# EAGLE board klbr4breakout (EAGLE 6.5.0)
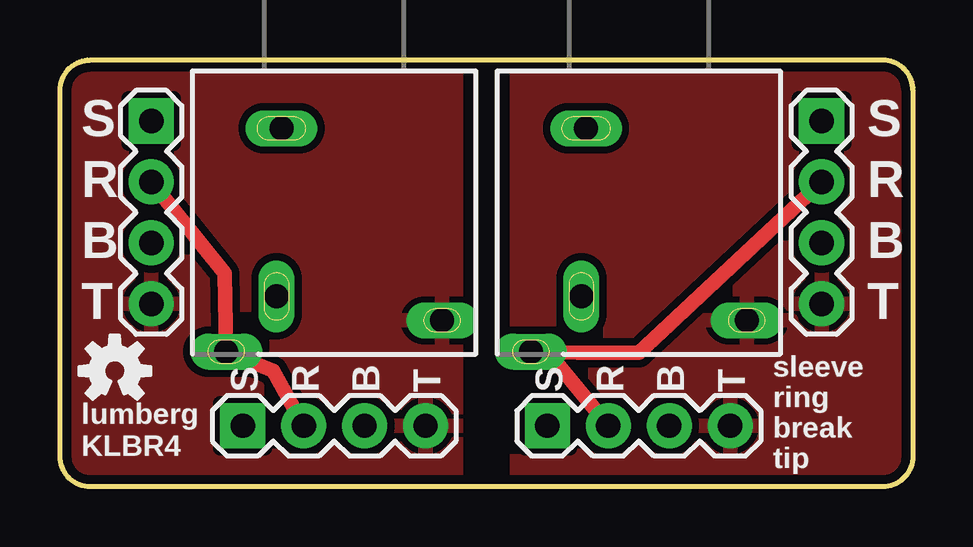
[diagram p0: board, top side]
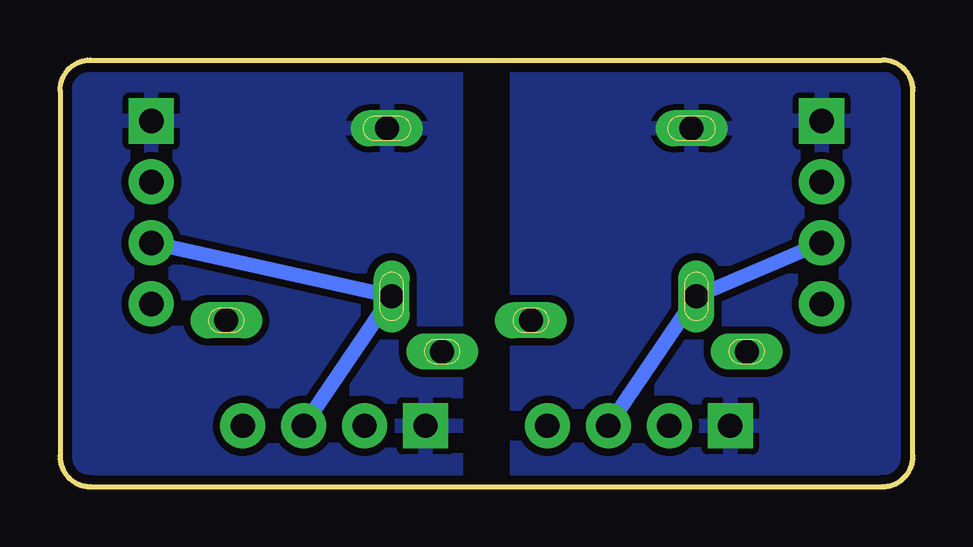
[diagram p1: board, bottom side, seen from below]

Size 35.56 x 17.78 mm. Coordinates in mm from the lower left corner, seen from the top.
Outline: 34.29,17.78 1.27,17.78 arc90 0,16.51 0,1.27 arc90 1.27,0 34.29,0 arc90 35.56,1.27 35.56,16.51 arc90 34.29,17.78
Copper layers (1*16): Top 0.0356mm / dielectric 1.5011mm / Bottom 0.0356mm
Design rules "LaenPCBOrder_Conservative": minimum track width 13mil, minimum drill 13mil, track to track 12mil, track to pad 12mil, pad to pad 12mil, via to via 12mil, smd to smd 12mil, copper to edge 15mil, drill to drill 12mil, minimum pad ring 7mil, minimum via ring 7mil, stop-mask expansion 4mil, vias tented up to drill 0mil, thermal gap 10mil
Net classes: 0 default: width 0.61 mm

## Footprints (pad centres in the part's own frame; a part is rotated, then mirrored left to right if it is on the bottom)
1X04 = drill 1.016 pad 1.88 square: 1 0,0 | drill 1.016 pad 1.88: 2 2.54,0; 3 5.08,0; 4 7.62,0
KLBR4 = drill 1 pad 1.3 long: B -2.4,-3.5; S -2.2,3.5 | drill 1 pad 1.2 long: R -4.5,-5.8; T 4.5,-4.5

## Placement (x,y rotation side)
JP1A  [1X04]  3.81,15.24 270 top
JP1B  [1X04]  7.62,2.54 0 top
JP2A  [1X04]  31.75,15.24 270 top
JP2B  [1X04]  20.32,2.54 0 top
U$1  [OSHW-LOGO-S]  2.29,4.83 0 top
X1  KLBR4  [KLBR4]  11.43,11.43 0 top
X2  KLBR4  [KLBR4]  24.13,11.43 0 top

## Library data of the parts
JP1A JP1B JP2A JP2B = SparkFun-Connectors
U$1 = SparkFun-Aesthetics
X1 X2 = ubiyubix

## Nets
BREAK1: JP1A.3 JP1B.3 X1.B
BREAK2: JP2A.3 JP2B.3 X2.B
RING1: JP1A.2 JP1B.2 X1.R
RING2: JP2A.2 JP2B.2 X2.R
SLEEVE1: JP1A.1 JP1B.1 X1.S
SLEEVE2: JP2A.1 JP2B.1 X2.S
TIP1: JP1A.4 JP1B.4 X1.T
TIP2: JP2A.4 JP2B.4 X2.T

## Tracks (layer width: path | path; a pad name or v marks a point on that pad's centre or on a via)
BREAK1
  Bottom 0.61: JP1A.3 X1.B JP1B.3
BREAK2
  Bottom 0.61: JP2B.3 X2.B JP2A.3
RING1
  Top 0.61: JP1A.2 6.86,8.89 X1.R 8.89,4.83 JP1B.2
RING2
  Top 0.61: X2.R 20.33,5.62 | 20.33,5.62 21.59,5.59 24.13,5.59 JP2A.2 | JP2B.2 20.33,5.62
SLEEVE1
  pour Bottom: 0,17.78 16.51,17.78 16.51,0 0,0
SLEEVE2
  pour Bottom: 19.05,17.78 19.05,0 35.56,0 35.56,17.78
TIP1
  pour Top: 0,17.78 16.51,17.78 16.51,0 0,0
TIP2
  pour Top: 19.05,17.78 19.05,0 35.56,0 35.56,17.78

## Text on the board
tPlace: S | S | R | R | B | B | T | T | sleeve | S | R | B | T | S | R | B | T | ring | break | lumberg / KLBR4 | tip